# EAGLE board Zig_Atm (EAGLE 5.10)
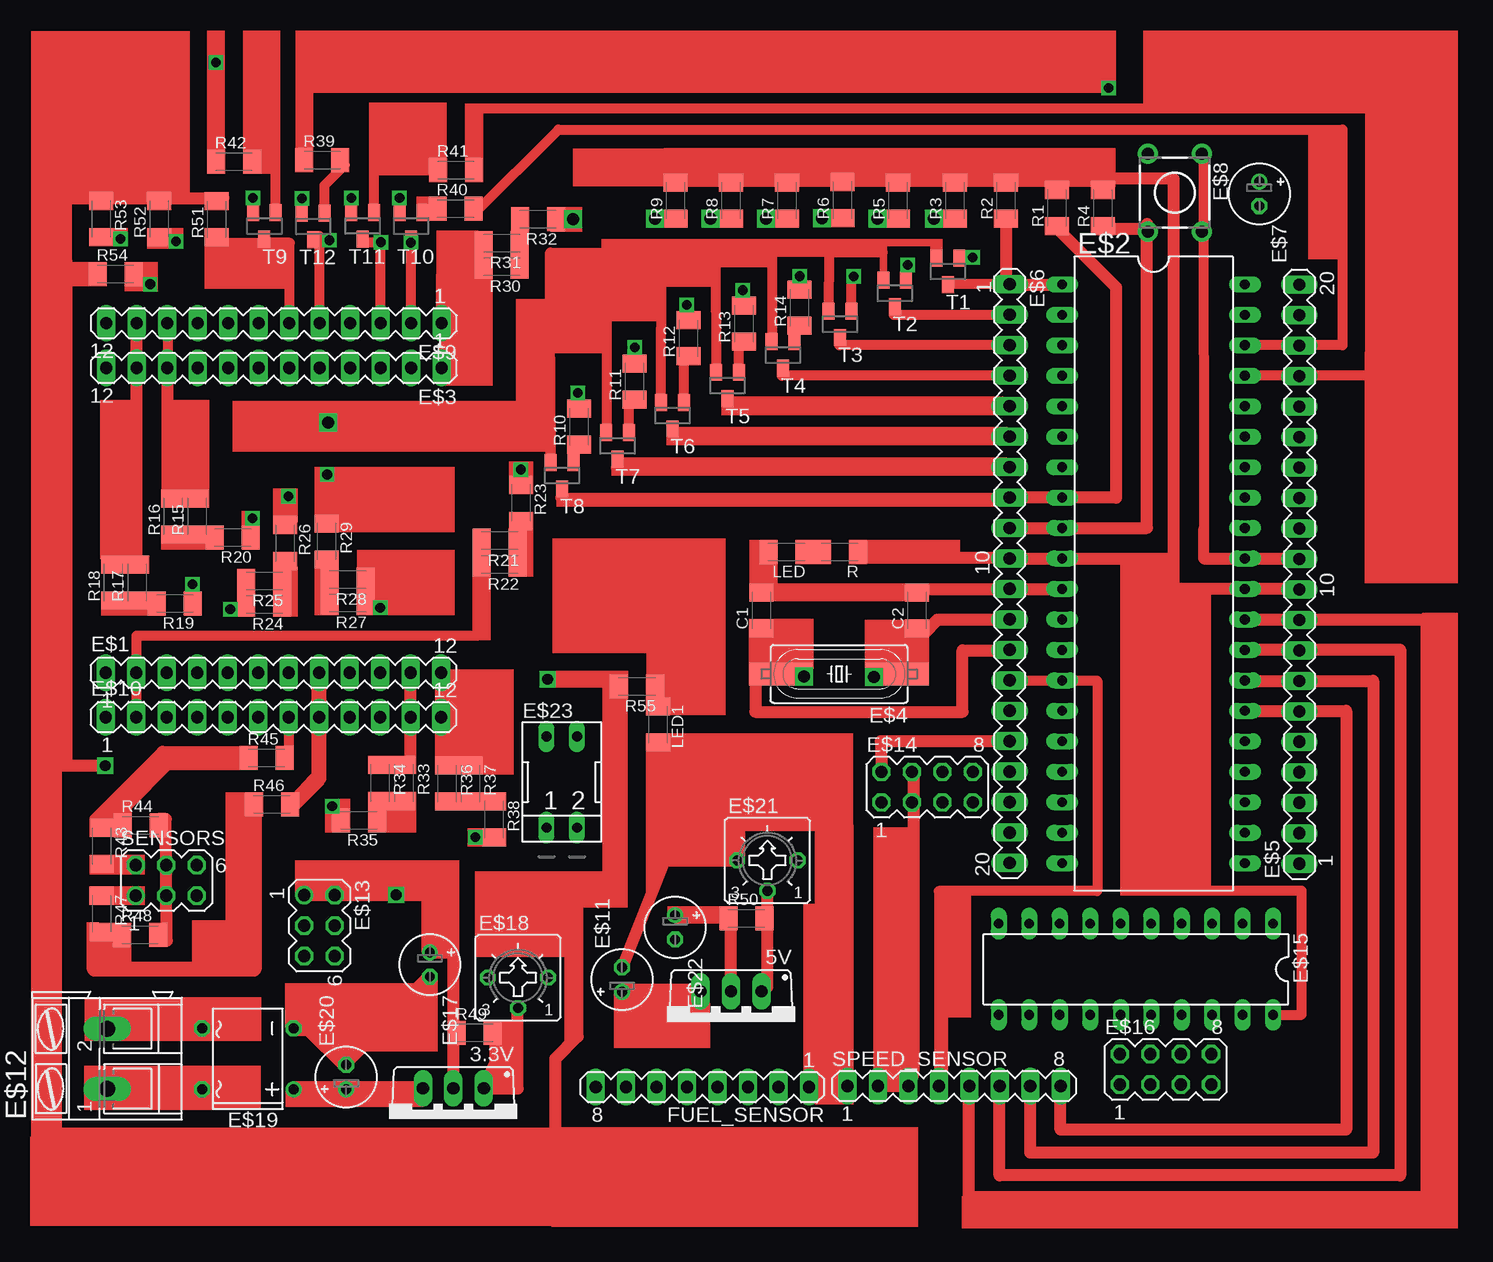
[diagram p0: board, top side]
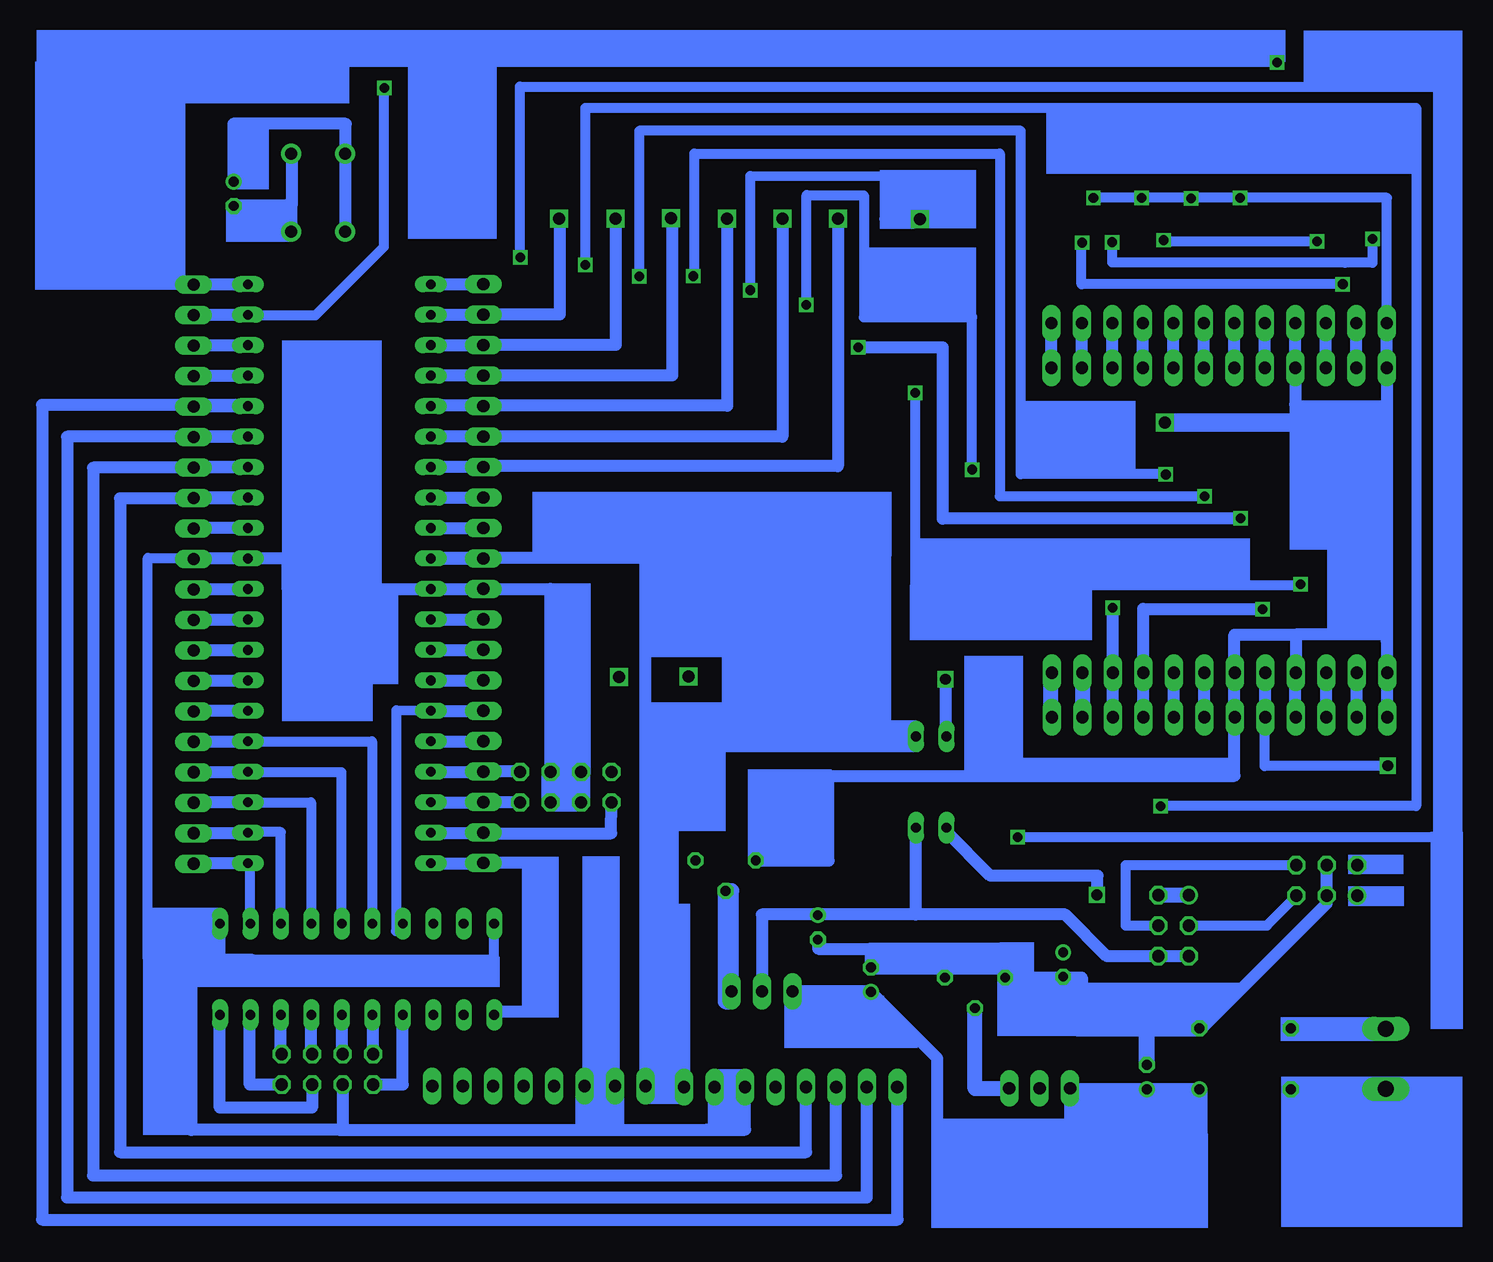
[diagram p1: board, bottom side, seen from below]

No outline drawn. Coordinates in mm, seen from the top.
Copper layers (1*16): Top 0.035mm / dielectric 1.5mm / Bottom 0.035mm
Design rules "default": minimum track width 10mil, minimum drill 24mil, track to track 8mil, track to pad 8mil, pad to pad 8mil, via to via 8mil, smd to smd 8mil, copper to edge 40mil, drill to drill 8mil, minimum pad ring 10mil, minimum via ring 8mil, stop-mask expansion 4mil, vias tented up to drill 0mil, thermal gap 10mil

## Footprints (pad centres in the part's own frame; a part is rotated, then mirrored left to right if it is on the bottom)
TO220V = drill 1.016 long: 1 -2.54,-2.54; 2 0,-2.54; 3 2.54,-2.54
C1206K = smd 1.5 x 2: 1 -1.5,0; 2 1.5,0
MA12-1 = drill 1.016 long: 1 -13.97,0; 2 -11.43,0; 3 -8.89,0; 4 -6.35,0; 5 -3.81,0; 6 -1.27,0; 7 1.27,0; 8 3.81,0; 9 6.35,0; 10 8.89,0; 11 11.43,0; 12 13.97,0
DIL40 = drill 0.813 long: 1 -24.13,-7.62; 2 -21.59,-7.62; 3 -19.05,-7.62; 4 -16.51,-7.62; 5 -13.97,-7.62; 6 -11.43,-7.62; 7 -8.89,-7.62; 8 -6.35,-7.62; 9 -3.81,-7.62; 10 -1.27,-7.62; 11 1.27,-7.62; 12 3.81,-7.62; 13 6.35,-7.62; 14 8.89,-7.62; 15 11.43,-7.62; 16 13.97,-7.62; 17 16.51,-7.62; 18 19.05,-7.62; 19 21.59,-7.62; 20 24.13,-7.62; 21 24.13,7.62; 22 21.59,7.62; 23 19.05,7.62; 24 16.51,7.62; 25 13.97,7.62; 26 11.43,7.62; 27 8.89,7.62; 28 6.35,7.62; 29 3.81,7.62; 30 1.27,7.62; 31 -1.27,7.62; 32 -3.81,7.62; 33 -6.35,7.62; 34 -8.89,7.62; 35 -11.43,7.62; 36 -13.97,7.62; 37 -16.51,7.62; 38 -19.05,7.62; 39 -21.59,7.62; 40 -24.13,7.62
HC49UP = smd 5.334 x 1.93: 1 -4.826,0; 2 4.826,0
MA20-1 = drill 1.016 long: 1 -24.13,0; 2 -21.59,0; 3 -19.05,0; 4 -16.51,0; 5 -13.97,0; 6 -11.43,0; 7 -8.89,0; 8 -6.35,0; 9 -3.81,0; 10 -1.27,0; 11 1.27,0; 12 3.81,0; 13 6.35,0; 14 8.89,0; 15 11.43,0; 16 13.97,0; 17 16.51,0; 18 19.05,0; 19 21.59,0; 20 24.13,0
E2-5 = drill 0.813 pad 1.27 round: + -1.016,0 | drill 0.813 pad 1.27 octagon: - 1.016,0
TL1105 = drill 1 pad 1.676 round: 1 -2.25,3.25; 2 2.25,3.25; 3 -2.25,-3.25; 4 2.25,-3.25
AK300/2 = drill 1.321 long: 1 -2.515,0; 2 2.489,0
MA03-2 = drill 1.016 round: 1 -2.54,-1.27 | drill 1.016 octagon: 2 -2.54,1.27; 3 0,-1.27; 4 0,1.27; 5 2.54,-1.27; 6 2.54,1.27
MA04-2 = drill 1.016 octagon: 1 -3.81,-1.27; 2 -3.81,1.27; 3 -1.27,-1.27; 4 -1.27,1.27; 5 1.27,-1.27; 6 1.27,1.27; 7 3.81,-1.27; 8 3.81,1.27
DIL20 = drill 0.813 long: 1 -11.43,-3.81; 2 -8.89,-3.81; 3 -6.35,-3.81; 4 -3.81,-3.81; 5 -1.27,-3.81; 6 1.27,-3.81; 7 3.81,-3.81; 8 6.35,-3.81; 9 8.89,-3.81; 10 11.43,-3.81; 11 11.43,3.81; 12 8.89,3.81; 13 6.35,3.81; 14 3.81,3.81; 15 1.27,3.81; 16 -1.27,3.81; 17 -3.81,3.81; 18 -6.35,3.81; 19 -8.89,3.81; 20 -11.43,3.81
CT6 = drill 0.813 octagon: A 2.515,0; E -2.515,0; S 0,-2.54
DB = drill 0.813 round: + -2.54,-3.81 | drill 0.813 octagon: - 2.54,-3.81; AC1 2.54,3.81; AC2 -2.54,3.81
EPG-02 = drill 0.813 long: 1 -1.27,-3.81; 2 1.27,-3.81; 3 1.27,3.81; 4 -1.27,3.81
MA08-1 = drill 1.016 long: 1 -8.89,0; 2 -6.35,0; 3 -3.81,0; 4 -1.27,0; 5 1.27,0; 6 3.81,0; 7 6.35,0; 8 8.89,0
SOT23 = smd 1 x 1.4: 1 -0.95,-1.1; 2 0.95,-1.1; 3 0,1.1

## Placement (x,y rotation side)
3.3V  [TO220V]  30.12,0.7 180 top
5V  [TO220V]  53.27,8.79 180 top
C1  22 pF  [C1206K]  55.8,43.09 90 top
C2  22 pF  [C1206K]  68.77,43.09 90 top
E$1  [MA12-1]  15.12,37.88 0 top
E$2  [DIL40]  88.49,46.14 270 top
E$3  [MA12-1]  15.16,63.3 180 top
E$4  [HC49UP]  62.28,37.78 180 top
E$5  [MA20-1]  100.65,46.1 90 top
E$6  [MA20-1]  76.49,46.15 270 top
E$7  [E2-5]  97.3,77.81 270 top
E$8  [TL1105]  90.26,77.91 180 top
E$9  [MA12-1]  15.16,67.03 180 top
E$10  [MA12-1]  15.12,34.18 0 top
E$11  [E2-5]  44.18,12.3 90 top
E$12  [AK300/2]  1.26,5.71 90 top
E$13  [MA03-2]  18.96,16.8 270 top
E$14  [MA04-2]  69.62,28.35 0 top
E$15  [DIL20]  87.02,13.17 180 top
E$16  [MA04-2]  89.49,4.82 0 top
E$17  [E2-5]  28.16,13.56 270 top
E$18  [CT6]  35.51,12.47 0 top
E$19  [DB]  12.99,5.7 90 top
E$20  [E2-5]  21.19,4.18 90 top
E$21  [CT6]  56.3,22.24 0 top
E$22  [E2-5]  48.61,16.66 270 top
E$23  [EPG-02]  39.16,28.77 0 top
FUEL_SENSOR  [MA08-1]  50.88,3.34 180 top
LED  [C1206K]  57.89,47.95 180 top
LED1  [C1206K]  47.19,33.57 270 top
R  240 Ohm  [C1206K]  62.33,47.95 180 top
R1  10k_Ohm  [C1206K]  80.45,76.63 90 top
R2  10k_Ohm  [C1206K]  76.19,77.26 90 top
R3  10k_Ohm  [C1206K]  71.93,77.26 90 top
R4  10k_Ohm  [C1206K]  84.26,76.62 90 top
R5  10k_Ohm  [C1206K]  67.2,77.25 90 top
R6  10k_Ohm  [C1206K]  62.55,77.28 90 top
R7  10k_Ohm  [C1206K]  57.93,77.26 90 top
R8  10k_Ohm  [C1206K]  53.27,77.26 90 top
R9  10k_Ohm  [C1206K]  48.66,77.25 90 top
R10  100 Ohm  [C1206K]  40.59,58.39 90 top
R11  100 Ohm  [C1206K]  45.22,62.17 90 top
R12  100 Ohm  [C1206K]  49.71,65.77 90 top
R13  100 Ohm  [C1206K]  54.33,66.99 90 top
R14  100 Ohm  [C1206K]  58.98,68.31 90 top
R15  1.1k Ohm  [C1206K]  8.76,50.92 90 top
R16  1.1k Ohm  [C1206K]  6.78,50.92 90 top
R17  1.1k Ohm  [C1206K]  3.75,45.41 90 top
R18  1.1k Ohm  [C1206K]  1.77,45.41 90 top
R19  100 Ohm  [C1206K]  6.9,43.65 180 top
R20  100 Ohm  [C1206K]  11.73,49.16 180 top
R21  1.1k Ohm  [C1206K]  33.99,48.89 180 top
R22  1.1k Ohm  [C1206K]  33.99,46.91 180 top
R23  100 Ohm  [C1206K]  35.75,52.04 270 top
R24  1.1k Ohm  [C1206K]  14.36,43.59 180 top
R25  1.1k Ohm  [C1206K]  14.36,45.54 180 top
R26  100 Ohm  [C1206K]  16.11,48.68 270 top
R27  1.1k Ohm  [C1206K]  21.32,43.71 180 top
R28  1.1k Ohm  [C1206K]  21.32,45.66 180 top
R29  100 Ohm  [C1206K]  19.57,48.83 270 top
R30  1.1k Ohm  [C1206K]  34.16,71.74 180 top
R31  1.1k Ohm  [C1206K]  34.16,73.72 180 top
R32  100 Ohm  [C1206K]  37.17,75.68 180 top
R33  1.1k Ohm  [C1206K]  26.02,28.7 270 top
R34  1.1k Ohm  [C1206K]  24.02,28.7 270 top
R35  100 Ohm  [C1206K]  22.26,25.57 180 top
R36  1.1k Ohm  [C1206K]  29.61,28.64 270 top
R37  1.1k Ohm  [C1206K]  31.56,28.64 270 top
R38  100 Ohm  [C1206K]  33.52,25.66 270 top
R39  1k_Ohm  [C1206K]  19.2,80.62 0 top
R40  1k Ohm  [C1206K]  30.31,76.57 0 top
R41  1k Ohm  [C1206K]  30.34,79.79 0 top
R42  1k_Ohm  [C1206K]  11.83,80.48 0 top
R43  1.8k Ohm  [C1206K]  0.81,23.43 270 top
R44  3.3k Ohm  [C1206K]  4.04,25.17 0 top
R45  3.3k Ohm  [C1206K]  14.55,30.77 0 top
R46  3.3k Ohm  [C1206K]  15.01,26.91 0 top
R47  1.8k Ohm  [C1206K]  0.79,17.8 270 top
R48  3.3k Ohm  [C1206K]  4.01,16.05 0 top
R49  240 Ohm  [C1206K]  31.89,7.85 0 top
R50  240 Ohm  [C1206K]  54.55,17.4 0 top
R51  1k_Ohm  [C1206K]  10.4,75.69 90 top
R52  1k_Ohm  [C1206K]  5.59,75.72 90 top
R53  1k_Ohm  [C1206K]  0.77,75.72 270 top
R54  1k_Ohm  [C1206K]  1.97,71.12 0 top
R55  240 Ohm  [C1206K]  45.43,36.75 180 top
SENSORS  [MA03-2]  6.19,20.57 0 top
SPEED_SENSOR  [MA08-1]  71.86,3.43 0 top
T1  BCW33  [SOT23]  71.35,71.34 180 top
T2  BCW33  [SOT23]  66.92,69.52 180 top
T3  BCW33  [SOT23]  62.36,66.94 180 top
T4  BCW33  [SOT23]  57.61,64.38 180 top
T5  BCW33  [SOT23]  52.97,61.83 180 top
T6  BCW33  [SOT23]  48.39,59.32 180 top
T7  BCW33  [SOT23]  43.81,56.8 180 top
T8  BCW33  [SOT23]  39.18,54.32 180 top
T9  BCW33  [SOT23]  14.37,75.13 180 top
T10  BCW33  [SOT23]  26.6,75.13 180 top
T11  BCW33  [SOT23]  22.56,75.14 180 top
T12  BCW33  [SOT23]  18.44,75.1 180 top

## Library data of the parts
3.3V 5V = transistor-pnp
C1 C2 E$7 E$11 E$17 E$20 E$22 LED LED1 R R1-R55 = rcl
E$1 E$3 E$5 E$6 E$9 E$10 E$13 E$14 E$16 FUEL_SENSOR SENSORS SPEED_SENSOR = con-lstb
E$2 = atmel
E$4 = crystal
E$8 = switch
E$12 = con-ptr500
E$15 = 74ttl-din
E$18 E$21 = pot
E$19 = rectifier
E$23 = special
T1-T12 = transistor

## Nets
S$82: E$2.23

## Tracks (layer width: path | path; a pad name or v marks a point on that pad's centre or on a via)
S$1
  Bottom 1.016: 1.16,37.87 1.16,41.06 8.78,41.06 | 8.78,41.06 8.78,37.84 | 13.88,37.87 13.88,41.06 8.78,41.06
S$2
  Bottom 1.016: 1.19,63.31 1.19,40.57 1.17,40.57
S$3
  Bottom 1.016: 8.79,63.3 8.79,60.1 1.2,60.1
S$4
  Top 1.016: 80.96,44.82 55.38,44.82 55.38,44.85
S$5
  Bottom 1.016: 81.05,47.42 76.41,47.42 | 76.46,44.84 92.79,44.84 92.79,47.41 100.68,47.41 | 81.1,42.31 76.46,42.31 | 81.06,39.77 76.42,39.77 | 81.09,37.23 76.45,37.23 | 81.01,34.7 76.37,34.7 | 81.11,32.16 76.47,32.16 | 81.08,29.62 76.44,29.62 | 81.08,27.08 76.44,27.08 | 81.06,24.54 76.42,24.54 | 81,22.01 76.36,22.01 | 81.08,49.96 76.44,49.96 | 81.05,52.5 76.41,52.5 | 81.02,55.07 76.38,55.07 | 81.04,62.68 76.4,62.68 | 81.04,65.19 76.4,65.19 | 81.04,67.74 76.4,67.74 | 81.07,70.27 76.43,70.27 | 96.09,44.83 100.73,44.83 | 96.04,49.94 100.68,49.94 | 96.08,52.48 100.72,52.48 | 96.05,55.02 100.69,55.02 | 96.13,57.55 100.77,57.55 | 96.03,60.09 100.67,60.09 | 96.06,62.63 100.7,62.63 | 96.06,65.17 100.7,65.17 | 96.08,67.71 100.72,67.71 | 96.14,70.24 100.78,70.24 | 96.06,42.29 100.7,42.29 | 96.09,39.75 100.73,39.75 | 96.12,37.18 100.76,37.18 | 96.09,34.69 100.73,34.69 | 96.13,32.11 100.77,32.11 | 96.1,29.57 100.74,29.57 | 96.1,27.06 100.74,27.06 | 96.1,24.51 100.74,24.51 | 96.07,21.98 100.71,21.98 | 56.17,75.81 56.17,60.14 81.01,60.14 | 51.56,75.74 51.56,57.56 81.05,57.56
S$6
  Top 1.016: 55.3,38.11 55.3,34.63 72.56,34.63 72.56,39.76 76.67,39.76
S$7
  Top 1.016: 76.47,47.41 90.17,47.41 90.17,75.25
S$8
  Top 1.016: 92.77,47.4 100.68,47.4
S$9
  Top 1.016: 90.18,74.53 90.18,79.06 48.1,79.07
S$10
  Top 1.016: 76.51,49.95 87.95,49.95 87.95,75.32
S$11
  Top 1.016: 88.02,74.7 88.07,74.87 84.46,74.87
S$12
  Bottom 1.016: 87.97,74.66 87.97,83.65 97.34,83.65 97.34,78.81
S$13
  Bottom 1.016: 92.49,81.2 92.49,77.26 92.49,77.24 92.49,76.82 | 92.49,76.82 97.34,76.82 | 92.49,74.52 92.49,76.82
S$14
  Top 1.016: 80.63,74.76 85.37,70.02 85.37,52.49 76.27,52.49
S$15
  Top 1.016: 76.2,75.93 76.2,70.26 81.12,70.26
S$16  (via drill 0.8, 1)
  other vias: 70.19,75.76 65.47,75.75 60.83,75.78 56.2,75.76 51.56,75.76 46.95,75.75 40.11,75.68 25.64,77.48 21.61,77.48 17.48,77.44 13.42,77.48 10.34,88.76
S$17
  Bottom 1.016: 70.14,75.81 70.14,67.75 76.93,67.75
S$18
  Bottom 1.016: 65.47,75.78 65.47,65.21 76.85,65.21
S$19
  Bottom 1.016: 60.76,75.78 60.76,62.67 76.62,62.67
S$20
  Bottom 1.016: 46.94,75.72 46.94,55.11 76.95,55.11
S$21
  Top 0.813: 76.53,67.71 66.83,67.71 66.83,67.74
S$22  (via drill 0.8)
  other vias: 58.98,70.95 63.48,70.94 67.98,71.89 73.42,72.52 54.26,69.78 49.57,68.57 45.24,65.02 40.49,61.22 11.52,43.17 8.36,45.25 24.02,43.3 20.02,26.77 31.94,24.18 84.76,86.62
S$23
  Top 0.813: 76.5,65.19 62.27,65.19
S$24
  Top 0.813: 76.56,62.64 57.51,62.64
S$25
  Top 0.813: 76.53,70.29 71.4,70.29 71.4,70.33
S$26
  Top 0.813: 76.53,60.09 52.89,60.09 52.89,60.12
S$27
  Top 0.813: 76.53,57.6 48.29,57.6 48.54,57.63
S$28
  Top 0.61: 70.58,73.74 65.98,73.74 65.98,70.61
S$29
  Top 0.813: 61.42,67.99 61.46,72.93 | 61.46,72.93 65.9,72.93 | 61.46,72.93 56.7,72.94 56.7,65.41
S$30
  Top 0.813: 52.04,62.92 52.01,72.93 | 52.01,72.93 56.73,72.93 | 47.43,60.47 47.46,72.93 | 47.46,72.93 52.01,72.93 | 47.46,72.93 42.9,72.91 | 42.9,72.91 42.9,57.9 | 38.21,55.49 38.2,72.94 42.9,72.91
S$31
  Top 0.813: 76.47,55.03 76.47,54.95 43.67,54.95
S$32
  Top 0.813: 76.47,52.45 39.04,52.45
S$33
  Top 0.813: 44.77,57.84 44.77,60.5
S$34
  Bottom 1.016: 45.27,65 38.19,65 38.19,50.74 13.35,50.74
S$35
  Top 0.813: 49.33,60.31 49.33,64.04
S$36
  Top 0.813: 53.95,62.95 53.95,65.48
S$37
  Top 0.813: 63.29,67.99 63.29,71.13
S$38
  Bottom 1.016: 6.21,21.87 6.21,18.62 16.65,8.18
S$39
  Bottom 0.813: 40.51,61.24 40.51,45.22 8.32,45.22
S$40
  Top 1.016: 3.68,67.02 3.68,46.68
S$41  (via drill 0.8)
  other vias: 13.37,50.76
S$42
  Top 1.016: 6.26,63.33 6.26,52.22
S$43  (via drill 0.8)
  other vias: 35.76,54.82 16.36,52.59 19.6,54.41 6.99,73.85 19.8,73.95 24.08,73.78 26.59,73.74 4.85,70.28 2.37,74.07
S$44
  Top 0.813: 3.74,33.89 3.72,40.99 32.13,40.99 32.13,48.06
S$45
  Bottom 0.813: 54.24,69.79 54.24,79.3 43.06,79.34 43.06,75.72 40.08,75.68
S$46
  Top 0.813: 6.3,67.04 6.3,63.25
S$47
  Bottom 0.813: 49.55,77.69 44.77,77.69 44.77,67.52 35.76,67.52 35.76,67.55 35.8,67.55 35.8,54.64
S$48
  Bottom 1.016: 21.47,37.89 21.48,43.2 11.56,43.21
S$49
  Bottom 1.016: 24.02,37.86 24.02,43.24
S$50
  Bottom 0.813: 49.55,68.51 49.55,77.72
S$51
  Top 0.813: 29.12,67.02 29.12,71.11 32.24,71.11
S$52
  Bottom 0.813: 58.9,70.95 58.9,81.16 33.45,81.16 33.45,52.6 16.32,52.6
S$53
  Bottom 0.813: 63.5,70.95 63.5,83.06 31.69,83.06 31.69,54.43 19.47,54.43
S$54
  Bottom 0.813: 67.98,71.87 67.98,84.99 -1.26,84.99 -1.26,26.78 20.01,26.78
S$55
  Top 1.016: 26.53,38.18 26.53,29.95 | 29.12,38.34 29.12,30.11
S$56
  Bottom 0.813: 73.44,72.47 73.44,86.76 -3.08,86.76 -3.08,24.17 32.08,24.17
S$57
  Top 0.813: 26.6,67.02 26.6,73.91
S$58
  Top 0.813: 24.05,66.99 24.05,73.74 22.7,73.74
S$59
  Top 0.813: 18.97,67.02 18.97,74.3 18.51,74.3
S$60
  Top 0.813: 23.52,76.07 23.52,79.77 28.9,79.77
S$61
  Bottom 0.813: 13.43,77.48 25.75,77.48
S$62
  Top 0.813: 15.3,76.1 15.3,80.49 13.27,80.49
S$63
  Top 0.813: 19.39,76.1 19.39,78.52 21.07,80.2
S$64
  Top 0.813: 16.48,67.02 16.48,73.74 14.45,73.74
S$65
  Bottom 0.813: 10.29,88.8 101.75,88.8 101.75,70.18
S$66
  Top 0.813: 10.36,80.42 10.36,88.7
S$67
  Bottom 0.813: 96.24,67.68 90.48,67.68 84.77,73.39 84.77,86.64
S$68
  Top 0.813: 17.64,80.6 17.64,86.64 84.83,86.64
S$69
  Top 0.813: 31.93,79.95 31.93,84.93 106.52,84.93 106.52,62.64 95.98,62.64
S$70
  Top 0.813: 92.63,81.26 92.67,47.49 100.9,47.48
S$71
  Top 0.813: 31.86,76.14 38.88,83.16 104.24,83.16 104.24,65.19 95.85,65.19
S$72
  Bottom 1.016: 76.54,24.51 65.83,24.51 65.8,27.12
S$73
  Bottom 1.016: 73.42,27.09 76.57,27.09 | 73.25,29.64 76.4,29.64
S$74
  Top 1.016: 76.5,32.17 65.76,32.17 65.8,29.53
S$75
  Bottom 1.016: 76.48,44.87 70.92,44.87 70.92,26.88
S$76
  Top 1.016: 76.52,42.29 70.45,42.29 69.38,41.22
S$77
  Top 1.016: 100.7,44.85 90.18,44.85 90.18,48.4
S$78
  Top 0.813: 100.67,47.33 92.66,47.33 92.66,49.92
S$79
  Bottom 0.813: 98.44,17.27 98.44,14.01 75.58,14.01 75.58,17.31
S$80
  Bottom 0.813: 95.72,14.02 104.47,14.02 104.47,47.46 95.72,47.46
S$81
  Bottom 0.813: 93.37,17.27 93.37,24.61 96.15,24.61
S$82
  Bottom 0.813: E$2.23 90.85,27.09 90.85,17.2
S$83
  Bottom 0.813: 96.15,29.61 88.33,29.61 88.33,17.2
S$84
  Bottom 0.813: 96.22,32.17 85.77,32.17 85.77,17.16
S$85
  Bottom 0.813: 95.92,17.27 95.92,22.09
S$86
  Bottom 1.016: 75.59,9.64 72.77,9.64 72.77,22.02 76.6,22.02
S$87
  Bottom 1.016: 85.66,6.3 85.7,6.3 85.7,9.82 | 88.26,6.22 88.26,9.74 | 90.86,6.1 90.86,9.62 | 93.38,6.21 93.38,9.73
S$88
  Bottom 1.016: 85.66,3.56 83.22,3.56 83.22,9.71
S$89
  Bottom 1.016: 93.33,3.54 95.96,3.54 95.96,9.71
S$90
  Bottom 1.016: 90.77,3.71 90.77,1.63 98.46,1.63 98.46,9.86
S$91
  Bottom 1.016: 88.23,3.71 88.23,-0.22 100.81,-0.22 100.81,13.94
S$92
  Bottom 0.813: 76.44,34.72 83.75,34.75 83.77,16.35
S$93
  Top 0.813: 98.44,9.38 100.84,9.38 100.84,19.72 90.07,19.72 90.07,46.89
S$94
  Bottom 1.016: 88.56,-0.2 66.07,-0.2 65.51,-0.2 | 65.51,-0.2 65.51,3.45 68.03,3.45 | 65.51,-0.2 57.25,-0.2 57.25,3.37
S$95
  Top 0.813: 76.49,37.24 83.79,37.24 83.79,19.68 70.6,19.68 70.6,3.37
S$96
  Top 1.016: 96.13,34.72 104.55,34.72 104.55,-0.2 80.74,-0.2 80.74,3.49
S$97
  Top 1.016: 96.05,37.2 106.8,37.2 106.8,-2.12 78.21,-2.12 78.21,3.49
S$98
  Top 1.016: 96.29,39.82 109.04,39.82 109.04,-4.01 75.66,-4.01 75.66,3.61
S$99
  Top 1.016: 96.05,42.31 111.21,42.31 111.21,-5.86 73.1,-5.86 73.1,3.53
S$100
  Bottom 1.016: 62.99,3.45 62.99,47.45 80.96,47.45
S$101
  Bottom 1.016: 59.73,3.33 59.73,6.86 62.98,6.86
S$102
  Bottom 1.016: 57.89,-0.2 54.68,-0.2 54.68,3.37
S$103
  Bottom 1.016: 96.1,52.42 106.77,52.42 106.77,-2.09 49.58,-2.09 49.58,3.37
S$104
  Bottom 1.016: 96.18,54.99 109.02,54.99 109.02,-4.01 47.09,-4.01 47.09,3.45
S$105
  Bottom 1.016: 96.02,57.56 111.19,57.56 111.19,-5.86 44.52,-5.86 44.52,3.37
S$106
  Bottom 1.016: 95.94,60.21 113.27,60.21 113.27,-7.71 41.96,-7.71 41.96,3.37
S$107
  Top 1.016: 76.45,47.46 63.76,47.46
S$108
  Top 1.016: 6.23,15.57 6.16,25.68 5.51,25.68
S$109
  Top 0.813: 0.21,25.74 5.8,31.33
S$110
  Top 0.813: 16.42,31.33 16.42,34.2
S$111
  Top 0.813: 5.88,31.37 12.92,31.37
S$112
  Top 0.813: 18.97,38.15 18.94,29.58 16.97,27.45
S$113
  Top 0.813: 6.2,19.33 6.18,19.33 6.18,15.43
S$114
  Top 1.27: 13.51,27.14 13.51,13.17 0.19,13.17 0.19,16.43
S$115
  Top 1.016: 44.24,13.33 47.75,22.25 | 47.75,22.25 50.21,22.25 53.75,22.25 | 47.75,22.25 47.69,22.25 47.69,32.15
S$116
  Bottom 0.813: 8.71,21.84 22.96,21.84 22.96,16.81 20.19,16.81
S$117
  Bottom 0.813: 17.72,16.81 11.18,16.81 8.63,19.36
S$118  (via drill 0.9)
  other vias: 1.1,30.13 37.98,37.34
S$119
  Bottom 1.016: 40.42,32.61 62.88,32.61
S$120
  Bottom 0.813: 1.05,30.13 11.36,30.1 11.35,36.09
S$121
  Bottom 1.016: 1.21,8.17 9.26,8.17 | 1.12,3.23 9.17,3.23
S$122
  Bottom 1.016: 16.76,3.14 27.69,3.14
S$123
  Bottom 1.016: 27.61,3.27 27.61,-0.63 38.66,-0.63 38.66,5.74 44.24,11.32
S$124  (via drill 0.9)
  Top 1.016: 17.68,19.36 v25.34,19.36 30.11,19.36 30.11,3.1
S$125
  Top 1.016: 32.64,3.23 33.65,5.38 33.65,8.24
S$126
  Top 1.016: 32.72,3.23 35.48,3.23 35.48,9.97
S$127
  Bottom 1.016: 33.05,12.49 33.01,12.49 | 33.01,12.49 26.6,12.49 26.6,8.3 21.2,8.3 | 21.2,8.3 21.2,5.24 | 16.8,8.3 21.2,8.3 | 33.01,12.49 33.01,14.88 42.69,14.88 44.24,14.88 | 44.24,14.88 44.24,13.24 | 48.59,15.63 48.59,14.88 44.24,14.88
S$128
  Top 1.016: 28.15,14.59 30.08,14.59 30.08,14.67
S$129
  Bottom 1.016: 44.15,11.32 50.82,11.32
S$130
  Bottom 1.016: 17.68,14.25 24.5,14.25 27.98,17.73 40.47,17.73 | 53.28,11.06 53.28,17.73 40.47,17.73 | 40.47,24.98 40.47,17.73
S$131
  Top 1.016: 53.37,10.86 53.28,10.86 53.28,17.23
S$132
  Top 1.016: 55.8,11.19 56.3,11.69 56.3,19.7
S$133
  Top 1.016: 1.17,30.13 -3.02,30.13 -3.02,-0.5 38.64,-0.5 38.64,5.71 40.49,7.56 40.49,19.47 43.59,19.47 43.59,37.26 37.81,37.26
S$134
  Bottom 1.016: 25.3,19.32 25.3,20.96 34.22,20.96 37.95,24.69 37.95,25.06
S$135
  Bottom 1.016: 37.91,32.52 37.95,32.52 37.95,37.26
S$136
  Bottom 0.813: 7.01,73.84 19.83,73.84 19.83,73.97
S$137
  Bottom 0.813: 3.08,72.08 24.06,72.08 24.06,73.8
S$138
  Bottom 0.813: 2.39,74.06 2.39,72.07 4.67,72.07
S$139
  Top 1.016: -3.03,27.62 -3.03,77.46 10.97,77.46
S$140
  Bottom 0.813: 4.83,70.28 26.62,70.28 26.62,73.81
S$141
  Bottom 0.813: 21.48,37.84 21.48,43.01 | 1.17,67.02 1.17,77.49 13.61,77.49
  Bottom 1.016: 53.72,22.24 47.71,22.24 47.71,29.3 13.87,29.3 13.87,34.14 13.87,35.32 13.87,37.86 | 29.12,63.3 29.12,67.02 | 26.58,63.3 26.58,67.02 | 24.04,63.3 24.04,67.02 | 21.51,63.3 21.51,67.02 | 18.97,63.3 18.97,67.02 | 16.43,63.3 16.43,67.02 | 13.89,63.3 13.89,67.02 | 11.35,63.3 11.35,67.02 | 8.82,63.3 8.82,67.02 | 6.25,63.3 6.25,67.02 | 3.71,63.3 3.71,67.02 | 1.17,63.3 1.17,67.02 | 16.4,34.17 16.4,37.89 | 18.94,34.17 18.94,37.89 | 21.48,34.17 21.48,37.84 21.48,37.89 | 24.01,34.17 24.01,37.89 | 26.55,34.17 26.55,37.89 | 29.09,34.17 29.09,37.89 | 11.3,34.17 11.3,37.89 | 8.79,34.17 8.79,37.89 | 6.22,34.17 6.22,37.89 | 3.69,34.17 3.69,37.89 | 1.15,34.14 1.15,37.86
S$142
  Top 1.016: 68.46,29.65 68.46,4.65 68.13,3.45
S$143
  Top 1.016: 65.52,3.44 68.18,3.44 68.18,3.49
S$144  (via drill 1)
  other vias: 19.69,58.73
S$145
  Top 0.813: 19.64,58.75 38.24,58.75 38.24,55.94
S$146
  Bottom 1.016: 8.81,60.28 8.81,58.72 19.78,58.68
S$147
  Bottom 1.27: 26.54,37.93 26.54,33.88
S$148
  Bottom 1.27: 29.17,34.08 29.17,38.36
S$149
  Top 1.27: 2.85,27.01 6.23,30.39 12.47,30.39
S$150
  Top 1.27: 16.64,26.79 18.93,29.08 18.93,38.19
S$151
  Bottom 1.27: 17.68,19.31 20.22,19.31 20.22,19.32
S$152  (via drill 1)
  other vias: 59.37,37.59
S$153  (via drill 1)
  other vias: 65.18,37.54
S$154
  Bottom 1.27: 32.64,3.21 35.5,3.21 35.5,9.87
S$155
  Bottom 1.27: 56.34,19.66 56.34,10.45 55.8,10.45 55.8,19.72 56.25,19.72
S$156
  Top 1.27: 16.77,8.27 21.22,8.27 21.22,5.56 | 21.22,5.13 21.22,5.56 | 21.22,5.56 28.21,12.55
S$157
  Top 1.27: 21.18,5.15 18.11,8.22 16.95,8.22
(copper drawn outside any net)
  shapes: Bottom area x74, Top area x130